# Altium PCB TG21_TX_Ma tran phim.PcbDoc (part 1 of 3)
Units mm, origin at the board's own origin, x right, y up, seen from the top; angles counter-clockwise.
Board outline 300 x 226.6 mm, 2 copper layers (Top Layer, Bottom Layer), stack 1.581 mm thick; 245 components, 229 nets, 914 pads, 4790 vias.
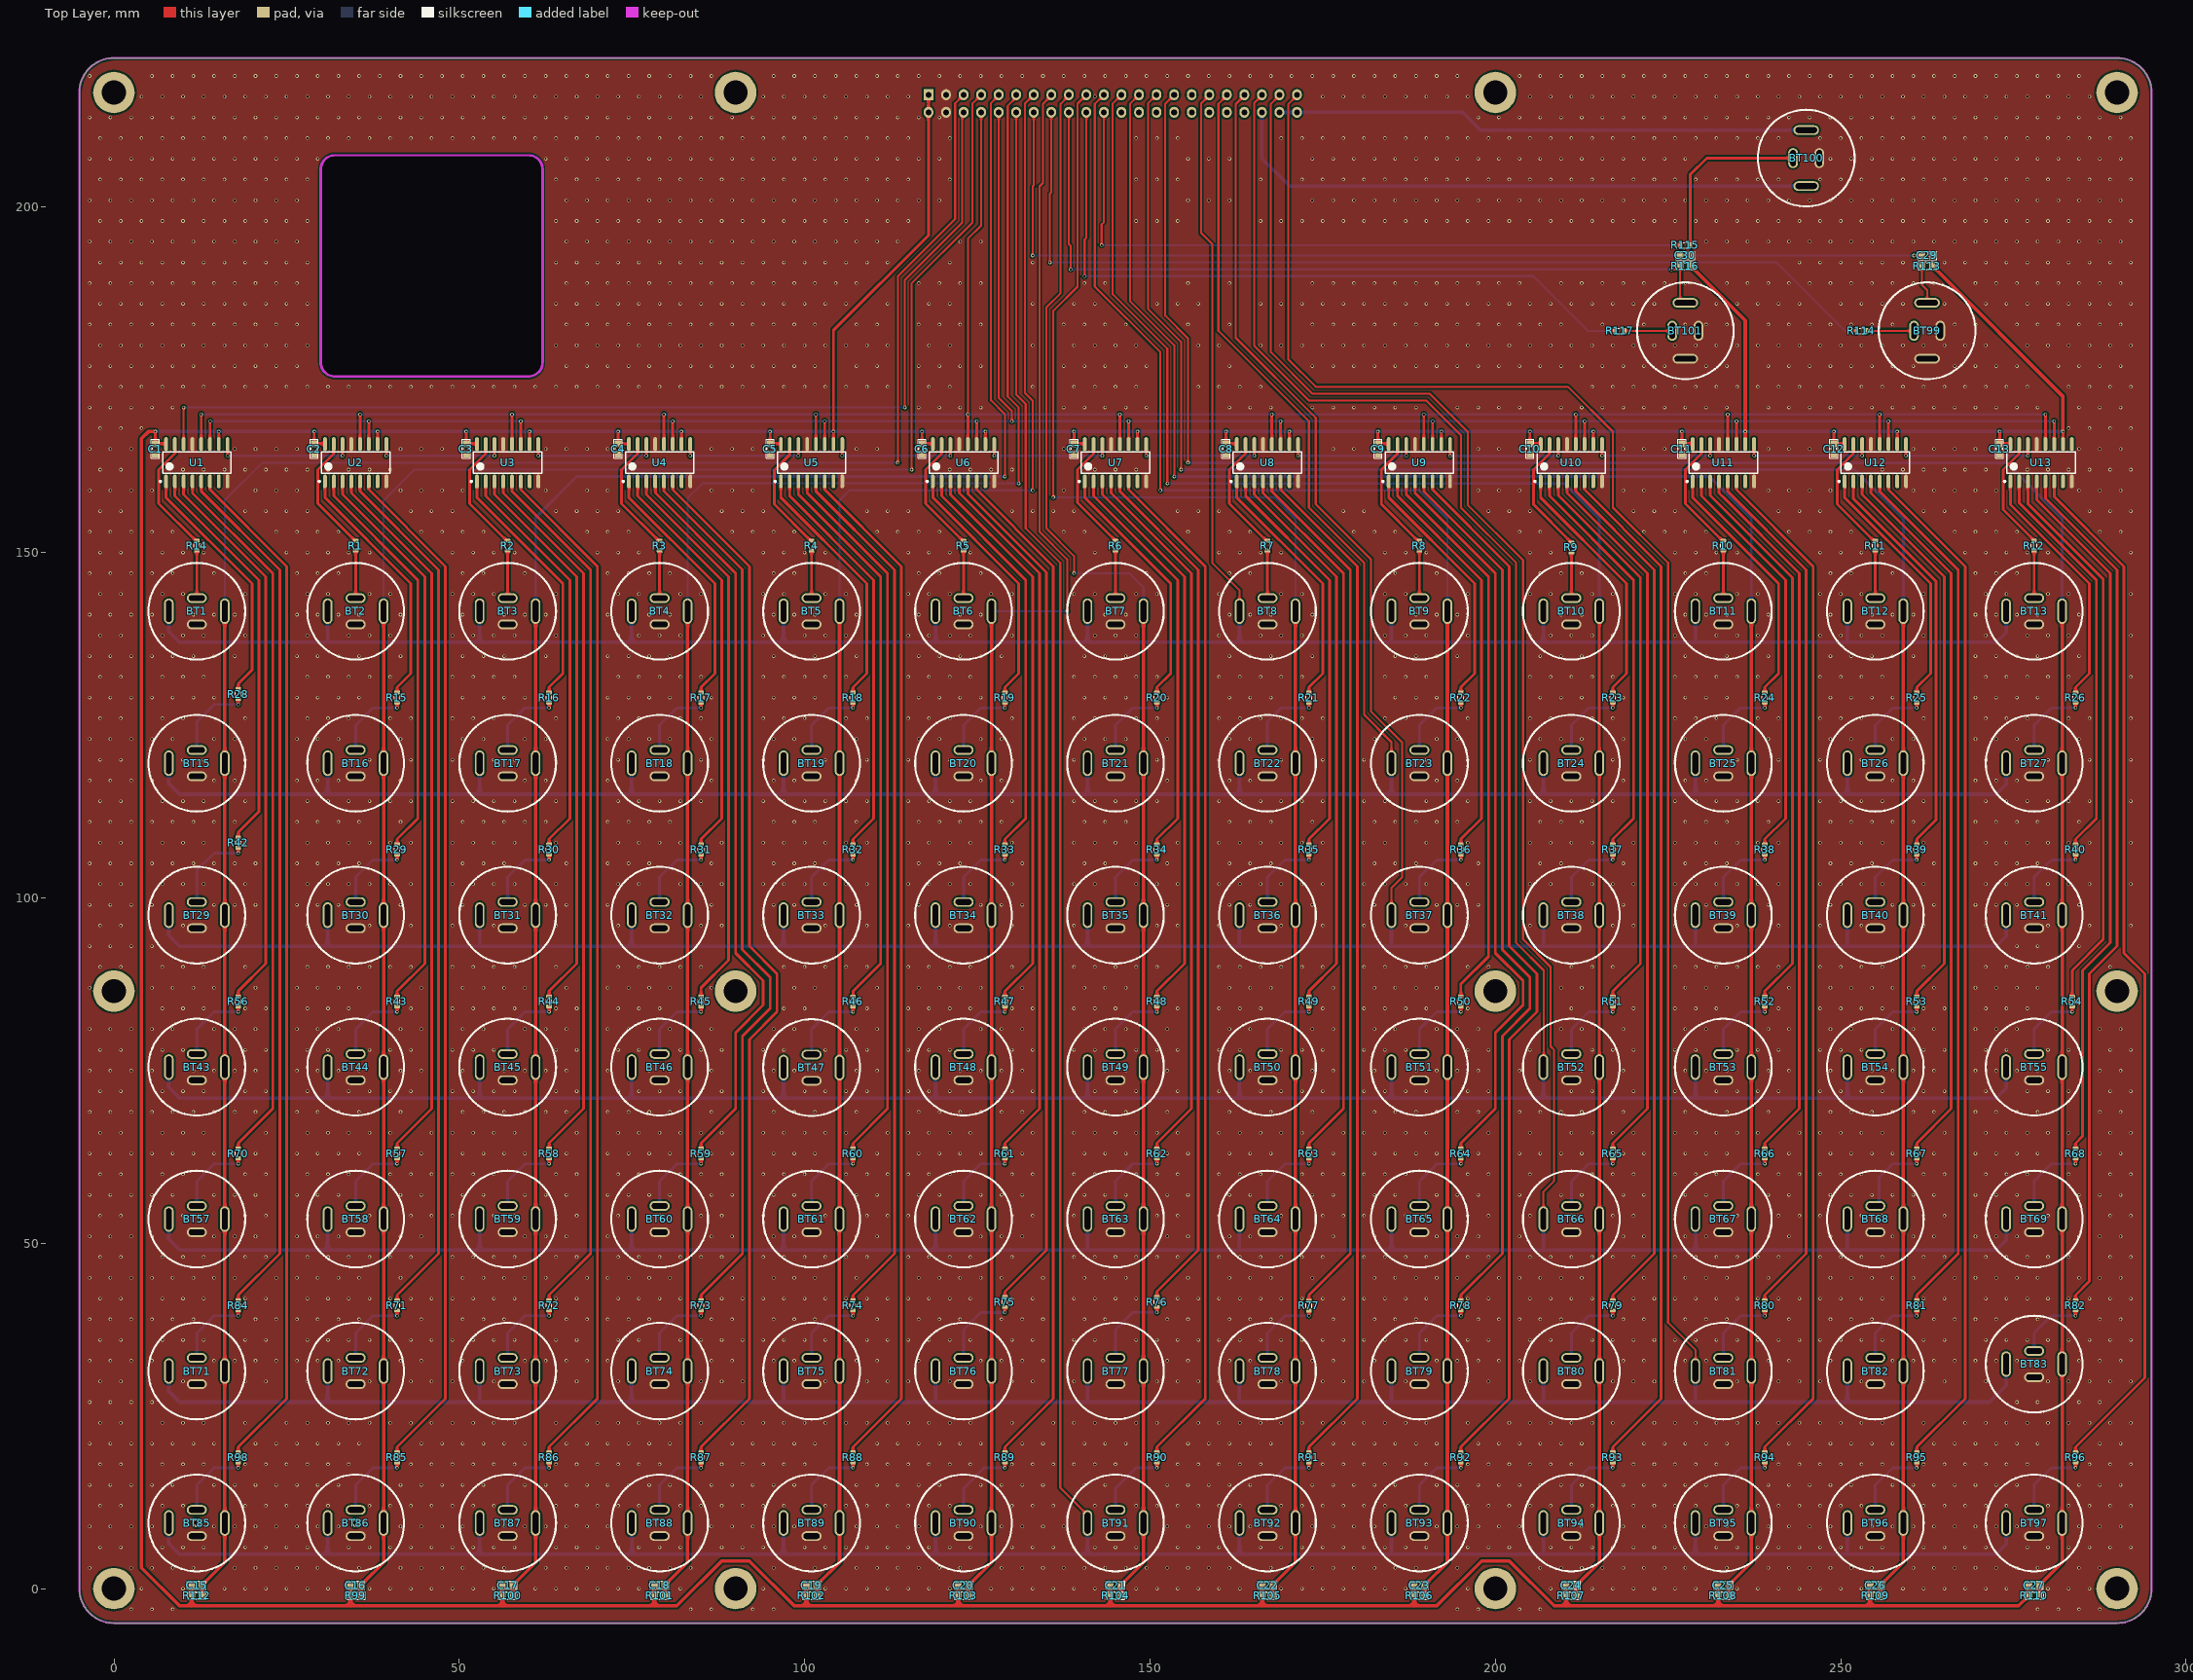
[diagram p0: Top Layer view]
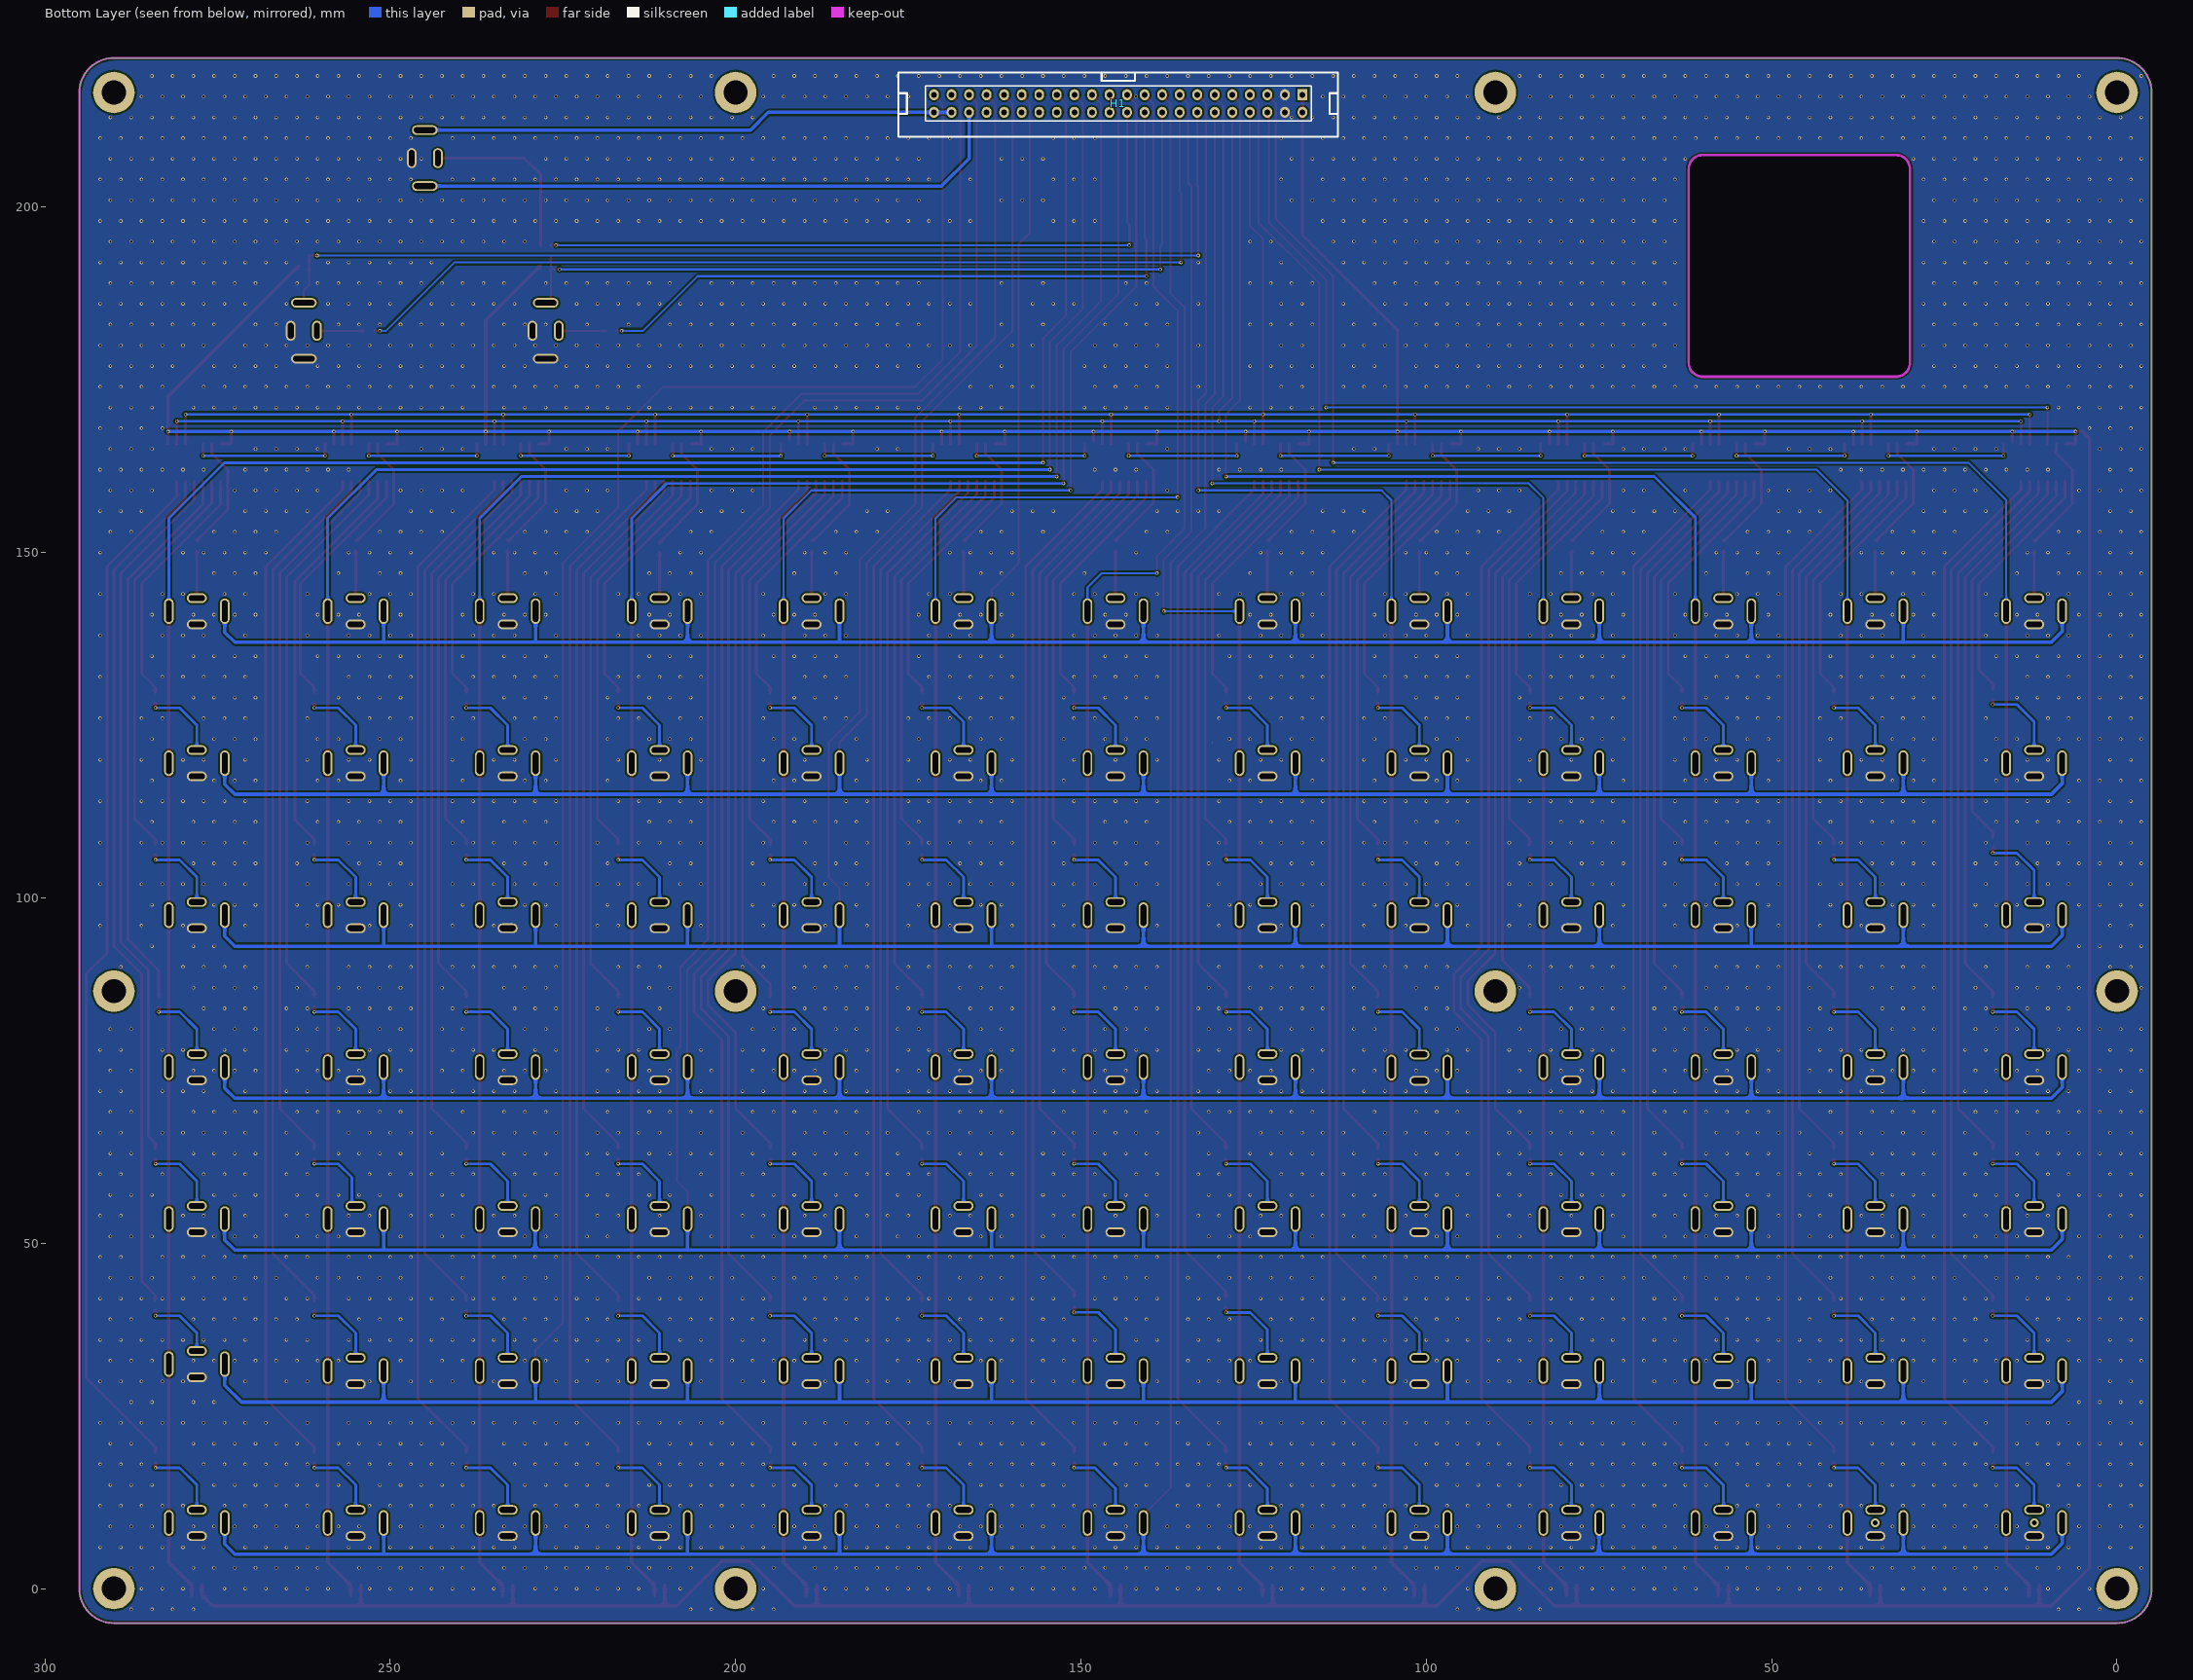
[diagram p1: Bottom Layer view, seen from below]
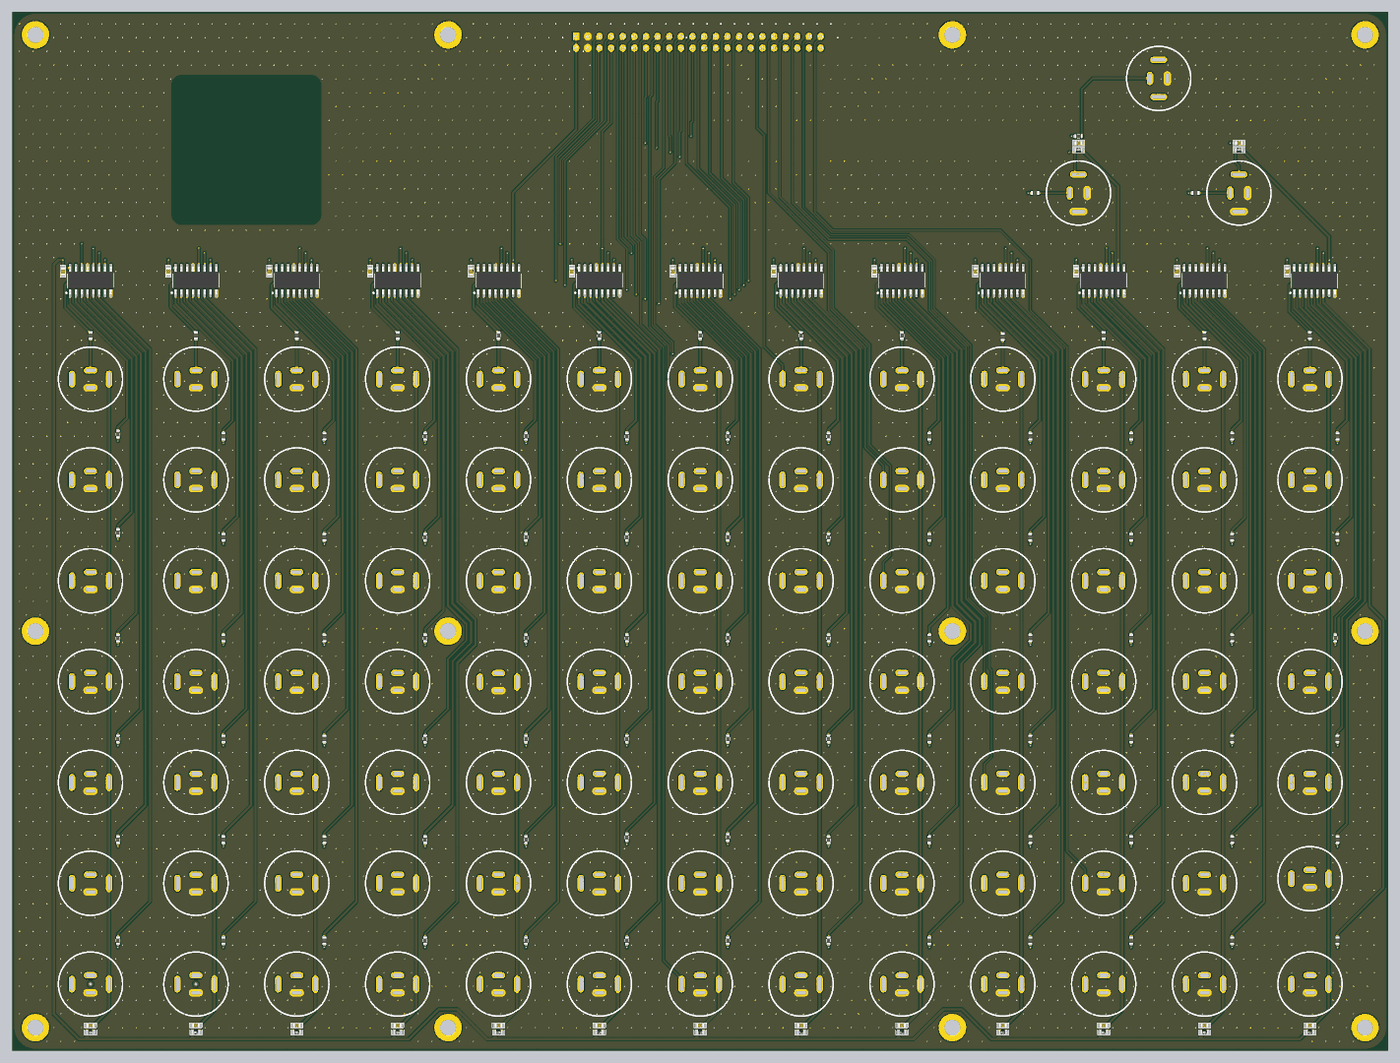
[diagram p4: 3D render of the assembled board from above, using the file's embedded part models]

## Layer stack, top to bottom
Top Solder: solder mask 0.0102, Solder Resist, Dk 3.5
Top Layer: signal copper 0.0356
Dielectric 1: dielectric 1.51, FR-4, Dk 4.8
Bottom Layer: signal copper 0.0356
Bottom Solder: solder mask 0.0102, Solder Resist, Dk 3.5

## Board outline
0,-5 cw(c0,0) -5,0 -5,216.6 cw(c0,216.6) 0,221.6 0.03,221.6 290,221.6 cw(c290,216.6) 295,216.6 295,0 cw(c290,0) 290,-5
cut-out: 32,175.35 cw(c32,177.5) 29.85,177.5 29.85,205.5 cw(c32,205.5) 32,207.65 cw(c32,207.5) 32.001,207.65 60,207.65 cw(c60,205.5) 62.15,205.5 62.15,177.5 cw(c60,177.5) 60.001,175.35 cw(c60,175.887) 60,175.35 ccw(c60,175.452) 60.001,175.35 60,175.35

## Design rules (kind name [scope] priority, off if disabled: settings)
Clearance [All] p1: gap=0.254 ignorepadtopadclearanceinfootprint=FALSE except(0.4: Arc-Arc Arc-Track Arc-SMDPad Track-Track Track-SMDPad)
HoleSize [All] p1 off: absolutevalues=TRUE maxlimit=2.54 minlimit=0.025 maxpercent=80.000 minpercent=20.000
HoleToHoleClearance [All] p1 off: gap=0.254 allowstackedmicrovias=TRUE
LayerPairs [All] p1 off: enforce=TRUE
MinimumSolderMaskSliver [All] p1 off: minsoldermaskwidth=0.254
NetAntennae [All] p1 off: netantennaetolerance=0
PolygonConnect [All] p1: connectstyle=Direct reliefconductorwidth=0.254 reliefentries=4 polygonreliefangle="90 Angle" airgapwidth=0.254
RoutingVias [All] p1: holewidth=0.3 width=0.5 viastyle="Through Hole" minholewidth=0.3 minwidth=0.5 maxholewidth=0.3 maxwidth=0.5
SilkToSilkClearance [All] p1 off: silktosilkclearance=0.254
SilkToSolderMaskClearance [IsPad] p1 off: minsilkscreentomaskgap=0.254 clearancetoexposedcopper=TRUE
SolderMaskExpansion [All] p1: expansion=0.102 istentingtop=FALSE
Width [All] p1: maxlimit=0.5 minlimit=0.3 preferedwidth=0.4
23 further rules are at their usual default settings.

## Components (designator, comment, footprint, x,y, rotation, side; value= is the part's Value field where it differs from the comment)
BT1 "BUTTON" "Metal Push Button Switch" 12,141.5 r270 top
BT2 "BUTTON" "Metal Push Button Switch" 35,141.5 r270 top
BT3 "BUTTON" "Metal Push Button Switch" 57,141.5 r270 top
BT4 "BUTTON" "Metal Push Button Switch" 79,141.5 r270 top
BT5 "BUTTON" "Metal Push Button Switch" 101,141.5 r270 top
BT6 "BUTTON" "Metal Push Button Switch" 123,141.5 r270 top
BT7 "BUTTON" "Metal Push Button Switch" 145,141.5 r270 top
BT8 "BUTTON" "Metal Push Button Switch" 167,141.5 r270 top
BT9 "BUTTON" "Metal Push Button Switch" 189,141.5 r270 top
BT10 "BUTTON" "Metal Push Button Switch" 211,141.5 r270 top
BT11 "BUTTON" "Metal Push Button Switch" 233,141.5 r270 top
BT12 "BUTTON" "Metal Push Button Switch" 255,141.5 r270 top
BT13 "BUTTON" "Metal Push Button Switch" 278,141.5 r270 top
BT15 "BUTTON" "Metal Push Button Switch" 12,119.5 r270 top
BT16 "BUTTON" "Metal Push Button Switch" 35,119.5 r270 top
BT17 "BUTTON" "Metal Push Button Switch" 57,119.5 r270 top
BT18 "BUTTON" "Metal Push Button Switch" 79,119.5 r270 top
BT19 "BUTTON" "Metal Push Button Switch" 101,119.5 r270 top
BT20 "BUTTON" "Metal Push Button Switch" 123,119.5 r270 top
BT21 "BUTTON" "Metal Push Button Switch" 145,119.5 r270 top
BT22 "BUTTON" "Metal Push Button Switch" 167,119.5 r270 top
BT23 "BUTTON" "Metal Push Button Switch" 189,119.5 r270 top
BT24 "BUTTON" "Metal Push Button Switch" 211,119.5 r270 top
BT25 "BUTTON" "Metal Push Button Switch" 233,119.5 r270 top
BT26 "BUTTON" "Metal Push Button Switch" 255,119.5 r270 top
BT27 "BUTTON" "Metal Push Button Switch" 278,119.5 r270 top
BT29 "BUTTON" "Metal Push Button Switch" 12,97.5 r270 top
BT30 "BUTTON" "Metal Push Button Switch" 35,97.5 r270 top
BT31 "BUTTON" "Metal Push Button Switch" 57,97.5 r270 top
BT32 "BUTTON" "Metal Push Button Switch" 79,97.5 r270 top
BT33 "BUTTON" "Metal Push Button Switch" 101,97.5 r270 top
BT34 "BUTTON" "Metal Push Button Switch" 123,97.5 r270 top
BT35 "BUTTON" "Metal Push Button Switch" 145,97.5 r270 top
BT36 "BUTTON" "Metal Push Button Switch" 167,97.5 r270 top
BT37 "BUTTON" "Metal Push Button Switch" 189,97.5 r270 top
BT38 "BUTTON" "Metal Push Button Switch" 211,97.5 r270 top
BT39 "BUTTON" "Metal Push Button Switch" 233,97.5 r270 top
BT40 "BUTTON" "Metal Push Button Switch" 255,97.5 r270 top
BT41 "BUTTON" "Metal Push Button Switch" 278,97.5 r270 top
BT43 "BUTTON" "Metal Push Button Switch" 12,75.5 r270 top
BT44 "BUTTON" "Metal Push Button Switch" 35,75.5 r270 top
BT45 "BUTTON" "Metal Push Button Switch" 57,75.5 r270 top
BT46 "BUTTON" "Metal Push Button Switch" 79,75.5 r270 top
BT47 "BUTTON" "Metal Push Button Switch" 101,75.43 r270 top
BT48 "BUTTON" "Metal Push Button Switch" 123,75.5 r270 top
BT49 "BUTTON" "Metal Push Button Switch" 145,75.5 r270 top
BT50 "BUTTON" "Metal Push Button Switch" 167,75.5 r270 top
BT51 "BUTTON" "Metal Push Button Switch" 189,75.5 r270 top
BT52 "BUTTON" "Metal Push Button Switch" 211,75.5 r270 top
BT53 "BUTTON" "Metal Push Button Switch" 233,75.5 r270 top
BT54 "BUTTON" "Metal Push Button Switch" 255,75.5 r270 top
BT55 "BUTTON" "Metal Push Button Switch" 278,75.5 r270 top
BT57 "BUTTON" "Metal Push Button Switch" 12,53.5 r270 top
BT58 "BUTTON" "Metal Push Button Switch" 35,53.5 r270 top
BT59 "BUTTON" "Metal Push Button Switch" 57,53.5 r270 top
BT60 "BUTTON" "Metal Push Button Switch" 79,53.5 r270 top
BT61 "BUTTON" "Metal Push Button Switch" 101,53.5 r270 top
BT62 "BUTTON" "Metal Push Button Switch" 123,53.5 r270 top
BT63 "BUTTON" "Metal Push Button Switch" 145,53.5 r270 top
BT64 "BUTTON" "Metal Push Button Switch" 167,53.5 r270 top
BT65 "BUTTON" "Metal Push Button Switch" 189,53.5 r270 top
BT66 "BUTTON" "Metal Push Button Switch" 211,53.5 r270 top
BT67 "BUTTON" "Metal Push Button Switch" 233,53.5 r270 top
BT68 "BUTTON" "Metal Push Button Switch" 255,53.5 r270 top
BT69 "BUTTON" "Metal Push Button Switch" 278,53.5 r270 top
BT71 "BUTTON" "Metal Push Button Switch" 12,31.5 r270 top
BT72 "BUTTON" "Metal Push Button Switch" 35,31.5 r270 top
BT73 "BUTTON" "Metal Push Button Switch" 57,31.5 r270 top
BT74 "BUTTON" "Metal Push Button Switch" 79,31.5 r270 top
BT75 "BUTTON" "Metal Push Button Switch" 101,31.5 r270 top
BT76 "BUTTON" "Metal Push Button Switch" 123,31.5 r270 top
BT77 "BUTTON" "Metal Push Button Switch" 145,31.5 r270 top
BT78 "BUTTON" "Metal Push Button Switch" 167,31.5 r270 top
BT79 "BUTTON" "Metal Push Button Switch" 189,31.5 r270 top
BT80 "BUTTON" "Metal Push Button Switch" 211,31.5 r270 top
BT81 "BUTTON" "Metal Push Button Switch" 233,31.5 r270 top
BT82 "BUTTON" "Metal Push Button Switch" 255,31.5 r270 top
BT83 "BUTTON" "Metal Push Button Switch" 278,32.5 r270 top
BT85 "BUTTON" "Metal Push Button Switch" 12,9.5 r270 top
BT86 "BUTTON" "Metal Push Button Switch" 35,9.5 r270 top
BT87 "BUTTON" "Metal Push Button Switch" 57,9.5 r270 top
BT88 "BUTTON" "Metal Push Button Switch" 79,9.5 r270 top
BT89 "BUTTON" "Metal Push Button Switch" 101,9.5 r270 top
BT90 "BUTTON" "Metal Push Button Switch" 123,9.5 r270 top
BT91 "BUTTON" "Metal Push Button Switch" 145,9.5 r270 top
BT92 "BUTTON" "Metal Push Button Switch" 167,9.5 r270 top
BT93 "BUTTON" "Metal Push Button Switch" 189,9.5 r270 top
BT94 "BUTTON" "Metal Push Button Switch" 211,9.5 r270 top
BT95 "BUTTON" "Metal Push Button Switch" 233,9.5 r270 top
BT96 "BUTTON" "Metal Push Button Switch" 255,9.5 r270 top
BT97 "BUTTON" "Metal Push Button Switch" 278,9.5 r270 top
BT99 "BUTTON" "Metal Push Button Switch" 262.5,182.1 r0 top
BT100 "BUTTON" "Metal Push Button Switch" 245,207.1 r0 top
BT101 "BUTTON" "Metal Push Button Switch" 227.5,182.1 r0 top
C1 "104" "tu 0603" 6,165 r90 top
C2 "104" "tu 0603" 29,165 r90 top
C3 "104" "tu 0603" 51,165 r90 top
C4 "104" "tu 0603" 73,165 r90 top
C5 "104" "tu 0603" 95,165 r90 top
C6 "104" "tu 0603" 117,165 r90 top
C7 "104" "tu 0603" 139,165 r90 top
C8 "104" "tu 0603" 161,165 r90 top
C9 "104" "tu 0603" 183,165 r90 top
C10 "104" "tu 0603" 205,165 r90 top
C11 "104" "tu 0603" 227,165 r90 top
C12 "104" "tu 0603" 249,165 r90 top
C13 "104" "tu 0603" 273,165 r90 top
C15 "104" "tu 0603" 12,0.5 r180 top
C16 "104" "tu 0603" 35,0.5 r180 top
C17 "104" "tu 0603" 57,0.5 r180 top
C18 "104" "tu 0603" 79,0.5 r180 top
C19 "104" "tu 0603" 101,0.5 r180 top
C20 "104" "tu 0603" 123,0.5 r180 top
C21 "104" "tu 0603" 145,0.5 r180 top
C22 "104" "tu 0603" 167,0.5 r180 top
C23 "104" "tu 0603" 189,0.5 r180 top
C24 "104" "tu 0603" 211,0.5 r180 top
C25 "104" "tu 0603" 233,0.5 r180 top
C26 "104" "tu 0603" 255,0.5 r180 top
C27 "104" "tu 0603" 278,0.5 r180 top
C29 "0603 - 100nF" "tu 0603" 262.5,193 r0 top
C30 "0603 - 100nF" "tu 0603" 227.5,193 r0 top
H1 "IDE44" IDE 144.6,215 r0 bottom locked
R1 "330R" RES-0603-2 35,151 r90 top
R2 "330R" RES-0603-2 57,151 r90 top
R3 "330R" RES-0603-2 79,151 r90 top
R4 "330R" RES-0603-2 101,151 r90 top
R5 "330R" RES-0603-2 123,151 r90 top
R6 "330R" RES-0603-2 145,151 r90 top
R7 "330R" RES-0603-2 167,151 r90 top
R8 "330R" RES-0603-2 189,151 r90 top
R9 "330R" RES-0603-2 211,150.725 r90 top
R10 "330R" RES-0603-2 233,151 r90 top
R11 "330R" RES-0603-2 255,151 r90 top
R12 "330R" RES-0603-2 278,151 r90 top
R14 "330R" RES-0603-2 12,151 r270 top
R15 "330R" RES-0603-2 41,129 r90 top
R16 "330R" RES-0603-2 63,129 r90 top
R17 "330R" RES-0603-2 85,129 r90 top
R18 "330R" RES-0603-2 107,129 r90 top
R19 "330R" RES-0603-2 129,129 r90 top
R20 "330R" RES-0603-2 151,129 r90 top
R21 "330R" RES-0603-2 173,129 r90 top
R22 "330R" RES-0603-2 195,129 r90 top
R23 "330R" RES-0603-2 217,129 r90 top
R24 "330R" RES-0603-2 239,129 r90 top
R25 "330R" RES-0603-2 261,129 r90 top
R26 "330R" RES-0603-2 284,129 r90 top
R28 "330R" RES-0603-2 18,129.5 r270 top
R29 "330R" RES-0603-2 41,107 r90 top
R30 "330R" RES-0603-2 63,107 r90 top
R31 "330R" RES-0603-2 85,107 r90 top
R32 "330R" RES-0603-2 107,107 r90 top
R33 "330R" RES-0603-2 129,107 r90 top
R34 "330R" RES-0603-2 151,107 r90 top
R35 "330R" RES-0603-2 173,107 r90 top
R36 "330R" RES-0603-2 195,107 r90 top
R37 "330R" RES-0603-2 217,107 r90 top
R38 "330R" RES-0603-2 239,107 r90 top
R39 "330R" RES-0603-2 261,107 r90 top
R40 "330R" RES-0603-2 284,107 r90 top
R42 "330R" RES-0603-2 18,108 r270 top
R43 "330R" RES-0603-2 41,85 r90 top
R44 "330R" RES-0603-2 63,85 r90 top
R45 "330R" RES-0603-2 85,85 r90 top
R46 "330R" RES-0603-2 107,85 r90 top
R47 "330R" RES-0603-2 129,85 r90 top
R48 "330R" RES-0603-2 151,85 r90 top
R49 "330R" RES-0603-2 173,85 r90 top
R50 "330R" RES-0603-2 195,85 r90 top
R51 "330R" RES-0603-2 217,85 r90 top
R52 "330R" RES-0603-2 239,85 r90 top
R53 "330R" RES-0603-2 261,85 r90 top
R54 "330R" RES-0603-2 283.5,85 r90 top
R56 "330R" RES-0603-2 18,85 r270 top
R57 "330R" RES-0603-2 41,63 r90 top
R58 "330R" RES-0603-2 63,63 r90 top
R59 "330R" RES-0603-2 85,63 r90 top
R60 "330R" RES-0603-2 107,63 r90 top
R61 "330R" RES-0603-2 129,63 r90 top
R62 "330R" RES-0603-2 151,63 r90 top
R63 "330R" RES-0603-2 173,63 r90 top
R64 "330R" RES-0603-2 195,63 r90 top
R65 "330R" RES-0603-2 217,63 r90 top
R66 "330R" RES-0603-2 239,63 r90 top
R67 "330R" RES-0603-2 261,63 r90 top
R68 "330R" RES-0603-2 284,63 r90 top
R70 "330R" RES-0603-2 18,63 r270 top
R71 "330R" RES-0603-2 41,41 r90 top
R72 "330R" RES-0603-2 63,41 r90 top
R73 "330R" RES-0603-2 85,41 r90 top
R74 "330R" RES-0603-2 107,41 r90 top
R75 "330R" RES-0603-2 129,41.5 r90 top
R76 "330R" RES-0603-2 151,41.5 r90 top
R77 "330R" RES-0603-2 173,40.956 r90 top
R78 "330R" RES-0603-2 195,41 r90 top
R79 "330R" RES-0603-2 217,41 r90 top
R80 "330R" RES-0603-2 239,41 r90 top
R81 "330R" RES-0603-2 261,41 r90 top
R82 "330R" RES-0603-2 284,41 r90 top
R84 "330R" RES-0603-2 18,41 r270 top
R85 "330R" RES-0603-2 41,19 r90 top
R86 "330R" RES-0603-2 63,19 r90 top
R87 "330R" RES-0603-2 85,19 r90 top
R88 "330R" RES-0603-2 107,19 r90 top
R89 "330R" RES-0603-2 129,19 r90 top
R90 "330R" RES-0603-2 151,19 r90 top
R91 "330R" RES-0603-2 173,19 r90 top
R92 "330R" RES-0603-2 195,19 r90 top
R93 "330R" RES-0603-2 217,19 r90 top
R94 "330R" RES-0603-2 239,19 r90 top
R95 "330R" RES-0603-2 261,19 r90 top
R96 "330R" RES-0603-2 284,19 r90 top
R98 "330R" RES-0603-2 18,19 r270 top
R99 "10k" "tro smd 0603" 35,-1 r0 top
R100 "10k" "tro smd 0603" 57,-1 r0 top
R101 "10k" "tro smd 0603" 79,-1 r0 top
R102 "10k" "tro smd 0603" 101,-1 r0 top
R103 "10k" "tro smd 0603" 123,-1 r0 top
R104 "10k" "tro smd 0603" 145,-1 r0 top
R105 "10k" "tro smd 0603" 167,-1 r0 top
R106 "10k" "tro smd 0603" 189,-1 r0 top
R107 "10k" "tro smd 0603" 211,-1 r0 top
R108 "10k" "tro smd 0603" 233,-1 r0 top
R109 "10k" "tro smd 0603" 255,-1 r0 top
R110 "10k" "tro smd 0603" 278,-1 r0 top
R112 "10k" "tro smd 0603" 12,-1 r0 top
R113 "0603 - 10K" "tro smd 0603" 262.5,191.5 r0 top
R114 "330R" RES-0603-2 253,182.1 r180 top
R115 "330R" RES-0603-2 227.5,194.5 r180 top
R116 "0603 - 10K" "tro smd 0603" 227.5,191.5 r0 top
R117 "330R" RES-0603-2 218,182.1 r180 top
U1 "74HC595 SMD" "SOP 16" 12,163 r90 top
U2 "74HC595 SMD" "SOP 16" 35,163 r90 top
U3 "74HC595 SMD" "SOP 16" 57,163 r90 top
U4 "74HC595 SMD" "SOP 16" 79,163 r90 top
U5 "74HC595 SMD" "SOP 16" 101,163 r90 top
U6 "74HC595 SMD" "SOP 16" 123,163 r90 top
U7 "74HC595 SMD" "SOP 16" 145,163 r90 top
U8 "74HC595 SMD" "SOP 16" 167,163 r90 top
U9 "74HC595 SMD" "SOP 16" 189,163 r90 top
U10 "74HC595 SMD" "SOP 16" 211,163 r90 top
U11 "74HC595 SMD" "SOP 16" 233,163 r90 top
U12 "74HC595 SMD" "SOP 16" 255,163 r90 top
U13 "74HC595 SMD" "SOP 16" 279,163 r90 top

## Footprints (in the part's own frame and the unit in brackets; to place one, negate y for a bottom-side part, rotate by r counter-clockwise, add the part's x,y. Pads: shape width x height; smd on the part's side, far side on the other; paste and mask are expansions set on the pad)
IDE [mm]
  rect 1.4x1.6 hole 0.85: 1(-26.67,-1.27)
  oval 1.4x1.6 hole 0.85: 2(-26.67,1.27) 3(-24.13,-1.27) 4(-24.13,1.27) 5(-21.59,-1.27) 6(-21.59,1.27) 7(-19.05,-1.27) 8(-19.05,1.27) 9(-16.51,-1.27) 10(-16.51,1.27) 11(-13.97,-1.27) 12(-13.97,1.27) 13(-11.43,-1.27) 14(-11.43,1.27) 15(-8.89,-1.27) 16(-8.89,1.27) 17(-6.35,-1.27) 18(-6.35,1.27) 19(-3.81,-1.27) 20(-3.81,1.27) 21(-1.27,-1.27) 22(-1.27,1.27) 23(1.27,-1.27) 24(1.27,1.27) 25(3.81,-1.27) 26(3.81,1.27) 27(6.35,-1.27) 28(6.35,1.27) 29(8.89,-1.27) 30(8.89,1.27) 31(11.43,-1.27) 32(11.43,1.27) 33(13.97,-1.27) 34(13.97,1.27) 35(16.51,-1.27) 36(16.51,1.27) 37(19.05,-1.27) 38(19.05,1.27) 39(21.59,-1.27) 40(21.59,1.27) 41(24.13,-1.27) 42(24.13,1.27) 43(26.67,-1.27) 44(26.67,1.27)
  silkscreen extent -31.8,-4.5 31.8,4.8, body extent -31.75,-4.45 31.75,4.65, height 8.9
"Metal Push Button Switch" [mm]
  oval 3.7x1.4 hole 0.8 slot 3.1 at 0 deg: 1(0,4.05) 2(0,-4.05)
  oval 1.4x2.9 hole 0.8 slot 2.3 at 90 deg: 3(-1.9,0) 4(1.9,0)
  silkscreen extent -7,-7 7,7
RES-0603-2 [mm]
  rrect50% 0.55x0.82 smd: 1(-0.725,0) 2(0.725,0)
  silkscreen extent -0.3,-0.4 0.3,0.4, body extent -0.8,-0.4 0.8,0.4, height 0.45
"SOP 16" [mm] "SOIC, 16-Leads, Body 9.90x3.91mm, Pitch 1.27mm, IPC Medium Density"
  oval 2x0.55 smd: 1(-2.7,4.445) 2(-2.7,3.175) 3(-2.7,1.905) 4(-2.7,0.635) 5(-2.7,-0.635) 6(-2.7,-1.905) 7(-2.7,-3.175) 8(-2.7,-4.445) 9(2.7,-4.445) 10(2.7,-3.175) 11(2.7,-1.905) 12(2.7,-0.635) 13(2.7,0.635) 14(2.7,1.905) 15(2.7,3.175) 16(2.7,4.445)
  silkscreen extent -2.82,-4.95 1.55,5.39, body extent -3,-4.95 3,4.95, height 1.4
"tro smd 0603" [mm]
  rect 1x0.95 smd mask+0.076: 1(-0.75,0) 2(0.75,0)
  silkscreen extent -1.35,-0.58 1.37,0.58, body extent -0.82,-0.42 0.82,0.43, height 0.44
"tu 0603" [mm]
  rect 1x0.95 smd mask+0.076: 1(-0.75,0) 2(0.75,0)
  silkscreen extent -1.35,-0.58 1.37,0.58, body extent -0.8,-0.4 0.8,0.4, height 0.9

## Part data
BT1 BT2 BT3 BT4 BT5 BT6 BT7 BT8 BT9 BT10 BT11 BT12 BT13 BT15 BT16 BT17 BT18 BT19 BT20 BT21 BT22 BT23 BT24 BT25 BT26 BT27 BT29 BT30 BT31 BT32 BT33 BT34 BT35 BT36 BT37 BT38 BT39 BT40 BT41 BT43 BT44 BT45 BT46 BT47 BT48 BT49 BT50 BT51 BT52 BT53 BT54 BT55 BT57 BT58 BT59 BT60 BT61 BT62 BT63 BT64 BT65 BT66 BT67 BT68 BT69 BT71 BT72 BT73 BT74 BT75 BT76 BT77 BT78 BT79 BT80 BT81 BT82 BT83 BT85 BT86 BT87 BT88 BT89 BT90 BT91 BT92 BT93 BT94 BT95 BT96 BT97 BT99 BT100 BT101: library part "Metal Push Button Switch", ComponentLink1Description=Link
C1 C2 C3 C4 C5 C6 C7 C8 C9 C10 C11 C12 C13 C15 C16 C17 C18 C19 C20 C21 C22 C23 C24 C25 C26 C27: library part "Tu 0603 104 50V 10%", "Dán", Chung_Loai=Dán, Don_Vi=Con, Ma_Hang=MH004568, So_Chan=2, Ten_Linh_Kien="Tụ 0603 104-100nF 10% 50V"
C29 C30: library part "Tu 0603 104 50V 10%", "50V 100nF X7R ±10% 0603 Multilayer Ceramic Capacitors MLCC - SMD/SMT ROHS", Chung_Loai=Dán, Don_Vi=Con, Ma_Hang=MH004568, So_Chan=2, Ten_Linh_Kien="Tụ 0603 104-100nF 10% 50V"
R1 R2 R3 R4 R5 R6 R7 R8 R9 R10 R11 R12 R14 R15 R16 R17 R18 R19 R20 R21 R22 R23 R24 R25 R26 R28 R29 R30 R31 R32 R33 R34 R35 R36 R37 R38 R39 R40 R42 R43 R44 R45 R46 R47 R48 R49 R50 R51 R52 R53 R54 R56 R57 R58 R59 R60 R61 R62 R63 R64 R65 R66 R67 R68 R70 R71 R72 R73 R74 R75 R76 R77 R78 R79 R80 R81 R82 R84 R85 R86 R87 R88 R89 R90 R91 R92 R93 R94 R95 R96 R98 R114 R115 R117: library part "Tro 0603 5% 330R", "Dán", Chung_Loai=Dán, Don_Vi=Con, Ma_Hang=MH006910, So_Chan=2, Ten_Linh_Kien="Trở 0603 5% 330R"
R99 R100 R101 R102 R103 R104 R105 R106 R107 R108 R109 R110 R112: library part "Tro 0603 1% 10k", "Dán", Chung_Loai=Dán, Don_Vi=Con, Ma_Hang=MH006333, So_Chan=2, Ten_Linh_Kien="Trở 0603 1% 10k"
R113 R116: library part "Tro 0603 1% 0R", "100mW Thick Film Resistor 75V ±100ppm/℃ ±1% 100kΩ 0603 Chip Resistor - Surface Mount ROHS", Chung_Loai=Dán, Don_Vi=Con, Ma_Hang=MH005792, So_Chan=2, Ten_Linh_Kien="Trở 0603 1% 0R"
U1 U2 U3 U4 U5 U6 U7 U8 U9 U10 U11 U12 U13: "Dán", Chung_Loai=Dán, Don_Vi=Con, Ma_Hang=MH000672, Ten_Linh_Kien="74HC595D SOP16"

## Free pads (board coordinates)
  round 6 hole 3.5: ""(0,0) ""(0,86.5) ""(0,216.6) ""(90,0) ""(90,86.5) ""(90,216.6) ""(200,0) ""(200,86.5) ""(200,216.6) ""(290,0) ""(290,86.5) ""(290,216.6)

## Via types
v1: diameter 0.5, hole 0.3, Top Layer to Bottom Layer, tented both sides, 4788 vias
v2: diameter 1.27, hole 0.711, Top Layer to Bottom Layer, tented both sides, 2 vias

## Nets (pads, with @x,y where several pads share a name; then routed paths per layer and width w, separated by ;. In a path a pad name is that pad's centre, name@x,y a point inside that pad or via, vN(x,y) a via of type N, cw(c..) or ccw(c..) an arc to the next point about the centre after c; other vN are vias at no path point)
BAT: BT100.2 H1.40 | length 87.1
  Bottom Layer w0.5: H1.40@166.19,213.73 166.19,207.08 170.22,203.05 BT100.2@245,203.05
BAT+: BT100.1 H1.42 H1.44 | length 77.3
  Bottom Layer w0.5: H1.42@168.73,213.73 H1.44@171.27,213.73 195.27,213.73 197.85,211.15 BT100.1@245,211.15
C1: BT1.1 BT15.1 BT29.1 BT43.1 BT57.1 BT71.1 BT85.1 C15.1 H1.5 R112.2 | length 316.8
  Top Layer w0.3: v1(113.5,163) 113.5,190 121.776,198.276 121.776,215.036 H1.5@123.01,216.27
  Top Layer w0.5: R112.2@12.75,-1 C15.1@12.75,0.5 12.775,0.5 13,0.725 13,0.75 16.05,3.8 BT85.1@16.05,9.5 BT71.1@16.05,31.5 BT57.1@16.05,53.5 BT43.1@16.05,75.5 BT29.1@16.05,97.5 BT15.1@16.05,119.5 BT1.1@16.05,141.5
  Bottom Layer w0.3: BT1.1@16.05,141.5 16.05,157.55 21.5,163 v1(113.5,163)
C2: BT2.1 BT16.1 BT30.1 BT44.1 BT58.1 BT72.1 BT86.1 C16.1 H1.7 R99.2 | length 296.5
  Top Layer w0.3: v1(115.5,162) 115.5,189 124.3,197.8 124.3,215.02 125.35,216.07 H1.7@125.35,216.17
  Top Layer w0.5: R99.2@35.75,-1 C16.1@35.75,0.5 35.775,0.5 36,0.725 36,0.75 39.05,3.8 BT86.1@39.05,9.5 BT72.1@39.05,31.5 BT58.1@39.05,53.5 BT44.1@39.05,75.5 BT30.1@39.05,97.5 BT16.1@39.05,119.5 BT2.1@39.05,141.5
  Bottom Layer w0.3: BT2.1@39.05,141.5 39.05,157.55 43.5,162 v1(115.5,162)
C3: BT3.1 BT17.1 BT31.1 BT45.1 BT59.1 BT73.1 BT87.1 C17.1 H1.9 R100.2 | length 284.5
  Top Layer w0.3: H1.9@128.09,216.27 128.09,216.17 126.986,215.066 126.986,172.014 129,170 v1(129,161)
  Top Layer w0.5: R100.2@57.75,-1 C17.1@57.75,0.5 57.775,0.5 58,0.725 58,0.75 61.05,3.8 BT87.1@61.05,9.5 BT73.1@61.05,31.5 BT59.1@61.05,53.5 BT45.1@61.05,75.5 BT31.1@61.05,97.5 61.05,114.05 ; 61,114 61.05,114.05 ; BT3.1@61.05,141.5 BT17.1@61.05,119.5 61.05,114.05
  Bottom Layer w0.4: BT3.1@61.05,141.5 61.05,155.05 67,161 v1(129,161)
C4: BT4.1 BT18.1 BT32.1 BT46.1 BT60.1 BT74.1 BT88.1 C18.1 H1.11 R101.2 | length 266.5
  Top Layer w0.3: H1.11@130.63,216.27 130.63,215.882 129.4,214.652 129.4,172.6 131,171 v1(131,160)
  Top Layer w0.5: R101.2@79.75,-1 C18.1@79.75,0.5 79.775,0.5 80,0.725 80,0.75 83.05,3.8 BT88.1@83.05,9.5 BT74.1@83.05,31.5 BT60.1@83.05,53.5 BT46.1@83.05,75.5 BT32.1@83.05,97.5 BT18.1@83.05,119.5 BT4.1@83.05,141.5
  Bottom Layer w0.3: BT4.1@83.05,141.5 83.05,157.874 85.176,160 v1(131,160)
C5: BT5.1 BT19.1 BT33.1 BT47.1 BT61.1 BT75.1 BT89.1 C19.1 H1.13 R102.2 | length 246.2
  Top Layer w0.3: v1(133,159) 133,172 131.9,173.1 131.9,215 H1.13@133.17,216.27
  Top Layer w0.5: R102.2@101.75,-1 101.75,0.475 102,0.725 102,0.75 105.05,3.8 BT89.1@105.05,9.5 BT75.1@105.05,31.5 105,31.55 BT61.1@105,53 ; BT61.1@105.05,53.5 BT47.1@105.05,75.43 BT33.1@105.05,97.5 BT19.1@105.05,119.5 BT5.1@105.05,141.5
  Bottom Layer w0.3: BT5.1@105.05,141.5 105.05,157.55 106.5,159 v1(133,159)
C6: BT6.1 BT20.1 BT34.1 BT48.1 BT62.1 BT76.1 BT90.1 C20.1 H1.15 R103.2 | length 232
  Top Layer w0.3: H1.15@135.71,216.27 135.71,216.17 134.5,214.96 134.5,203.5 134,203 134,153 138,149 v1(138,141.5)
  Top Layer w0.5: R103.2@123.75,-1 C20.1@123.75,0.5 123.775,0.5 124,0.725 124,0.75 127.05,3.8 BT90.1@127.05,9.5 BT76.1@127.05,31.5 BT62.1@127.05,53.5 BT48.1@127.05,75.5 BT34.1@127.05,97.5 BT20.1@127.05,119.5 BT6.1@127.05,141.5
  Bottom Layer w0.3: BT6.1@127.05,141.5 v1(138,141.5)
C7: BT7.1 BT21.1 BT35.1 BT49.1 BT63.1 BT77.1 BT91.1 C21.1 H1.17 R104.2 | length 230.5
  Top Layer w0.3: H1.17@138.25,216.27 138.25,216.17 137.05,214.97 137.05,187.55 135,185.5 135,153.5 139,149.5 v1(139,147)
  Top Layer w0.5: R104.2@145.75,-1 C21.1@145.75,0.5 145.775,0.5 146,0.725 146,0.75 149.05,3.8 BT91.1@149.05,9.5 BT77.1@149.05,31.5 BT63.1@149.05,53.5 BT49.1@149.05,75.5 BT35.1@149.05,97.5 BT21.1@149.05,119.5 BT7.1@149.05,141.5
  Bottom Layer w0.3: v1(139,147) 147,147 149.05,144.95 BT7.1@149.05,141.5
C8: BT8.1 BT22.1 BT36.1 BT50.1 BT64.1 BT78.1 BT92.1 C22.1 H1.19 R105.2 | length 253.9
  Top Layer w0.3: v1(136,158) 136,185 139.5,188.5 139.5,214.98 H1.19@140.79,216.27
  Top Layer w0.5: R105.2@167.75,-1 C22.1@167.75,0.5 167.775,0.5 168,0.725 168,0.75 171.05,3.8 BT92.1@171.05,9.5 BT78.1@171.05,31.5 BT64.1@171.05,53.5 BT50.1@171.05,75.5 BT36.1@171.05,97.5 BT22.1@171.05,119.5 BT8.1@171.05,141.5
  Bottom Layer w0.3: v1(136,158) 158.6,158 168,158 171.05,154.95 BT8.1@171.05,141.5
C9: BT9.1 BT23.1 BT37.1 BT51.1 BT65.1 BT79.1 BT93.1 C23.1 H1.21 R106.2 | length 262.3
  Top Layer w0.3: H1.21@143.33,216.27 142,214.94 142,188.5 151.5,179 v1(151.5,159)
  Top Layer w0.5: R106.2@189.75,-1 C23.1@189.75,0.5 189.775,0.5 190,0.725 190,0.75 193.05,3.8 BT93.1@193.05,9.5 BT79.1@193.05,31.5 BT65.1@193.05,53.5 BT51.1@193.05,75.5 BT37.1@193.05,97.5 BT23.1@193.05,119.5 BT9.1@193.05,141.5
  Bottom Layer w0.3: v1(151.5,159) 189,159 193.05,154.95 BT9.1@193.05,141.5
C10: BT10.1 BT24.1 BT38.1 BT52.1 BT66.1 BT80.1 BT94.1 C24.1 H1.23 R107.2 | length 282
  Top Layer w0.3: H1.23@145.87,216.27 144.6,215 144.6,187.4 152.5,179.5 152.5,160.022 v1(152.522,160)
  Top Layer w0.4: BT52.1@215.05,75.5 BT38.1@215.05,97.5 BT24.1@215.05,119.5 BT10.1@215.05,141.5
  Top Layer w0.5: R107.2@211.75,-1 C24.1@211.75,0.5 211.775,0.5 212,0.725 212,0.75 215.05,3.8 BT94.1@215.05,9.5 BT80.1@215.05,31.5 BT66.1@215.05,53.5 BT52.1@215.05,75.5
  Bottom Layer w0.4: v1(152.522,160) 176.99,160 210,160 215.05,154.95 BT10.1@215.05,141.5
C11: BT11.1 BT25.1 BT39.1 BT53.1 BT67.1 BT81.1 BT95.1 C25.1 H1.25 R108.2 | length 301.9
  Top Layer w0.3: H1.25@148.41,216.27 147.1,214.96 147.1,186.4 153.5,180 v1(153.5,161)
  Top Layer w0.5: R108.2@233.75,-1 C25.1@233.75,0.5 233.775,0.5 234,0.725 234,0.75 237.05,3.8 BT95.1@237.05,9.5 BT81.1@237.05,31.5 BT67.1@237.05,53.5 BT53.1@237.05,75.5 BT39.1@237.05,97.5 BT25.1@237.05,119.5 BT11.1@237.05,141.5
  Bottom Layer w0.4: v1(153.5,161) 231,161 237.05,154.95 BT11.1@237.05,141.5
C12: BT12.1 BT26.1 BT40.1 BT54.1 BT68.1 BT82.1 BT96.1 C26.1 H1.27 R109.2 | length 321.6
  Top Layer w0.3: H1.27@150.95,216.27 149.7,215.02 149.7,185.3 154.5,180.5 v1(154.5,162)
  Top Layer w0.5: R109.2@255.75,-1 C26.1@255.75,0.5 255.775,0.5 256,0.725 256,0.75 259.05,3.8 BT96.1@259.05,9.5 BT82.1@259.05,31.5 BT68.1@259.05,53.5 BT54.1@259.05,75.5 BT40.1@259.05,97.5 BT26.1@259.05,119.5 BT26.1@259.05,120.05 ; BT26.1@259,120 BT26.1@259.05,120.05 ; BT12.1@259.05,141.5 BT26.1@259.05,120.05
  Bottom Layer w0.4: v1(154.5,162) 252,162 259.05,154.95 BT12.1@259.05,141.5
C13: BT13.1 BT27.1 BT41.1 BT55.1 BT69.1 BT83.1 BT97.1 C27.1 H1.29 R110.2 | length 342.4
  Top Layer w0.3: H1.29@153.49,216.27 152.2,214.98 152.2,184.3 155.5,181 v1(155.5,163)
  Top Layer w0.5: R110.2@278.75,-1 C27.1@278.75,0.5 278.775,0.5 282.05,3.775 BT97.1@282.05,9.5 BT83.1@282.05,32.5 BT69.1@282.05,53.5 BT55.1@282.05,75.5 BT41.1@282.05,97.5 BT27.1@282.05,119.5 BT13.1@282.05,141.5
  Bottom Layer w0.4: v1(155.5,163) 274,163 282.05,154.95 BT13.1@282.05,141.5
DATA: H1.6 U1.14 | length 155.8
  Top Layer w0.3: U1.14@10.095,165.7 U1.14@10.095,166.105 ; v1(10.095,171) v1@10.095,170.995 ; U1.14@10.1,166.1 U1.14@10.095,166.105 ; v1@10.1,171 v1@10.095,170.995 ; v1(114.5,171) 114.5,189.462 122.81,197.772 H1.6@122.81,213.63 ; U1.14@10.095,166.105 v1@10.095,170.995
  Bottom Layer w0.3: v1@10.1,171 v1(114.5,171)